# Altium PCB Axis Driver PCB.PcbDoc (part 2 of 2)
Units mil, origin at the board's own origin, x right, y up, seen from the top; angles counter-clockwise.
Board outline 7230 x 2255 mil, 2 copper layers (Top Layer, Bottom Layer); 120 components, 90 nets, 456 pads, 132 vias.
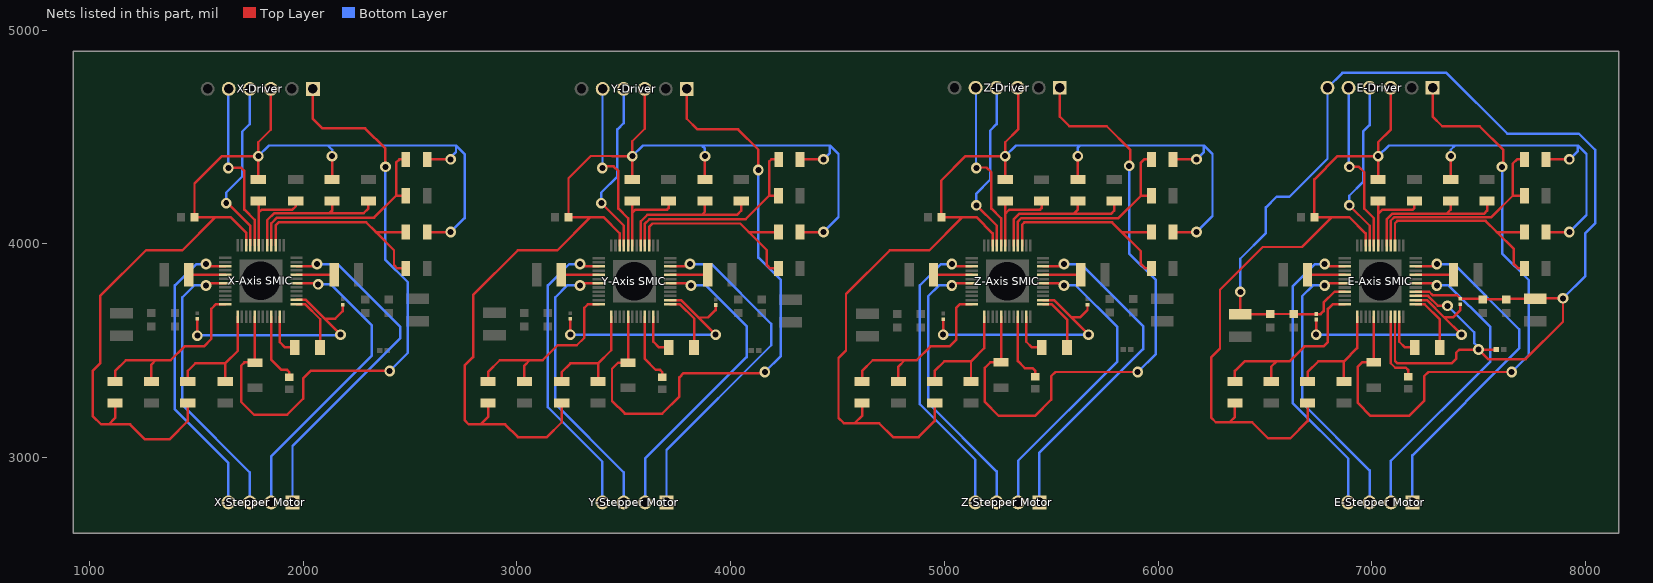
[diagram p2: the nets of this part, all layers, seen from the top]

## Via types
v1: diameter 50, hole 28, Top Layer to Bottom Layer, 128 vias
v2: diameter 200, hole 125, Top Layer to Bottom Layer, 4 vias

## Nets (pads, with @x,y where several pads share a name; then routed paths per layer and width w, separated by ;. In a path a pad name is that pad's centre, name@x,y a point inside that pad or via, vN(x,y) a via of type N, cw(c..) or ccw(c..) an arc to the next point about the centre after c; other vN are vias at no path point) (continued)
Net0.47uF_E_1: 0.47uF_E.1 100nF_2_E.1 100nF_3_E.1 100nF_4_E.1 100nF_5_E.1 100nF_16V_1_E.1 100nF_16V_2_E.1 100uF_1_E.1 100uF_2_E.1 "E-Axis SMIC.21" "E-Axis SMIC.34" "E-Axis SMIC.39" "E-Axis SMIC.40" E-Driver.6 | length 6470
  Top Layer w11.5: v1(6385,3775) 100uF_2_E.1@6385,3670 6523.5,3670 100nF_5_E.1@6525,3671.5 100nF_4_E.1@6635,3671.5 6635.51,3670.98 100nF_16V_2_E.1@6740,3670.98 6760.98,3670.98 6775,3685 6775,3725 6825.79,3775.79 6873.15,3775.79 ; 7108.9,3658.15 7108.9,3451.1 7120,3440 7373.26,3440 7395,3461.74 7395,3490 7410,3505 v1(7500,3505) ; 7206.85,3756.1 7263.9,3756.1 7310,3710 v1(7355,3710) ; 7206.85,3775.79 7269.21,3775.79 7285,3760 7397.99,3760 7411.69,3746.3 7412.48,3746.3 7415,3743.78 100nF_16V_1_E.1@7415,3742.99 7517.01,3742.99 100nF_2_E.1@7520,3740 100nF_3_E.1@7630,3740 7632.36,3742.36 100uF_1_E.1@7765,3742.36 7767.64,3745 v1(7895,3745) 7895,3635 7720,3460 7545,3460 v1(7500,3505) ; 0.47uF_E.1@7582.68,3505 v1(7500,3505)
  Bottom Layer w11.5: v1(6385,3775) 6385,3930 6505,4050 6505,4170 6555,4220 6615,4220 6793.15,4398.15 E-Driver.6@6793.15,4730 6863.15,4800 7350,4800 7635,4515 7970,4515 8045,4440 8045,4095 8000,4050 8000,3850 v1(7895,3745) ; v1(7355,3710) 7480,3585 7480,3535.42 7500,3515.42 v1(7500,3505)
Net0.47uF_E_2: 
Net4.7uF_E_2: 4.7uF_E.2 "E-Axis SMIC.33" | length 342.9
  Top Layer w11.5: 7089.21,3658.15 7089.21,3440.79 7110,3420 7160,3420 7170,3410 4.7uF_E.2@7170,3377.95
Net4.7uF_X_2: 4.7uF_X.2 "X-Axis SMIC.33" | length 334.9
  Top Layer w11.5: 1851.06,3659.25 1851.06,3456.89 1897.95,3410 1925,3410 1935,3400 4.7uF_X.2@1935,3375
Net4.7uF_Y_2: 4.7uF_Y.2 "Y-Axis SMIC.33" | length 328.3
  Top Layer w11.5: 3599.21,3658.15 3599.21,3460.79 3650,3410 3670,3410 3680,3400 4.7uF_Y.2@3680,3375
Net4.7uF_Z_2: 4.7uF_Z.2 "Z-Axis SMIC.33" | length 335.4
  Top Layer w11.5: 5344.21,3658.15 5344.21,3450.79 5376.5,3418.5 5413.58,3418.5 5425,3407.08 4.7uF_Z.2@5425,3377.95
Net10k_Dr_Enb_E_2: 10k_Dr_Enb_E.2 "E-Axis SMIC.29" E-Driver.1 | length 3019.5
  Top Layer w11.5: 7010.47,3658.15 7010.47,3445.47 10k_Dr_Enb_E.2@7010,3445 6955,3445 6935,3425 6935,3255 6995,3195 7175,3195 7245,3265 7245,3380 7265,3400 v1(7655,3400) ; E-Driver.1@7285.28,4730 7285.28,4594.72 7330,4550 7505,4550 7614.54,4440.46 7614.54,4364.54 v1(7610,4360)
  Bottom Layer w11.5: v1(7610,4360) 7610,3955 7735,3830 7735,3480 v1(7655,3400)
Net10k_Dr_Enb_X_2: 10k_Dr_Enb_X.2 "X-Axis SMIC.29" X-Driver.1 | length 2968.8
  Top Layer w11.5: 1772.32,3659.25 1772.32,3446.73 1770.59,3445 1725,3445 1710,3430 1710,3260 1770,3200 1925,3200 2000,3275 2000,3370 2035,3405 v1(2405,3405) ; X-Driver.1@2045.28,4725 2045.28,4584.72 2090,4540 2290,4540 2385,4445 v1(2385,4360)
  Bottom Layer w11.5: v1(2385,4360) 2385,3925 2490,3820 2490,3490 v1(2405,3405)
Net10k_Dr_Enb_Y_2: 10k_Dr_Enb_Y.2 "Y-Axis SMIC.29" Y-Driver.1 | length 2974.3
  Top Layer w11.5: 3520.47,3658.15 3520.47,3444.53 10k_Dr_Enb_Y.2@3520,3444.06 3474.06,3444.06 3445,3415 3445,3265 3505,3205 3680,3205 3760,3285 3760,3375 3780,3395 4155,3395 v1(4160,3400) ; Y-Driver.1@3795,4725 3795,4585 3845,4535 4035,4535 4130,4440 v1(4130,4345)
  Bottom Layer w11.5: v1(4130,4345) 4130,3935 4235,3830 4235,3475 v1(4160,3400)
Net10k_Dr_Enb_Z_2: 10k_Dr_Enb_Z.2 "Z-Axis SMIC.29" Z-Driver.1 | length 3007.5
  Top Layer w11.5: 5265.47,3658.15 5265.47,3445.47 10k_Dr_Enb_Z.2@5265,3445 5215,3445 5190,3420 5190,3260 5255,3195 5425,3195 5500,3270 5500,3380 5520,3400 v1(5905,3400) ; Z-Driver.1@5540.28,4730 5540.28,4594.72 5585,4550 5760,4550 5869.25,4440.75 5869.25,4369.25 v1(5865,4365)
  Bottom Layer w11.5: v1(5865,4365) 5865,3955 5990,3830 5990,3485 v1(5905,3400)
Net22nF_E_1: 22nF_E.1 "E-Axis SMIC.37" | length 272.7
  Top Layer w11.5: 7207.01,3716.58 7206.85,3716.73 7248.27,3716.73 7319.06,3645.94 22nF_E.1@7319.06,3515
Net22nF_E_2: 22nF_E.2 "E-Axis SMIC.35" | length 200
  Top Layer w11.5: 7128.58,3658.15 7128.58,3541.42 7155,3515 22nF_E.2@7200.94,3515
Net22nF_X_1: 22nF_X.1 "X-Axis SMIC.37" | length 272.8
  Top Layer w11.5: 1968.7,3717.83 2008.83,3717.83 2080,3646.67 2080,3515.94 22nF_X.1@2079.06,3515
Net22nF_X_2: 22nF_X.2 "X-Axis SMIC.35" | length 200.4
  Top Layer w11.5: 1890.43,3659.25 1890.43,3539.57 1915,3515 22nF_X.2@1960.94,3515
Net22nF_Y_1: 22nF_Y.1 "Y-Axis SMIC.37" | length 276.2
  Top Layer w11.5: 3716.85,3716.73 3763.27,3716.73 3830,3650 3830,3515.94 22nF_Y.1@3829.06,3515
Net22nF_Y_2: 22nF_Y.2 "Y-Axis SMIC.35" | length 200
  Top Layer w11.5: 3638.58,3658.15 3638.58,3541.42 3665,3515 22nF_Y.2@3710.94,3515
Net22nF_Z_1: 22nF_Z.1 "Z-Axis SMIC.37" | length 273.3
  Top Layer w11.5: 5461.85,3716.73 5503.27,3716.73 5575,3645 5575,3515.94 22nF_Z.1@5574.06,3515
Net22nF_Z_2: 22nF_Z.2 "Z-Axis SMIC.35" | length 200
  Top Layer w11.5: 5383.58,3658.15 5383.58,3541.42 5410,3515 22nF_Z.2@5455.94,3515
Net100nF_1_E_2: 100nF_1_E.2 "E-Axis SMIC.10" CFG0_VCC_IO_E.1 CFG1_VCC_IO_E.1 CFG2_VCC_IO_E.1 CFG3_VCC_IO_E.1 CFG4_VCC_IO_E.1 CFG5_VCC_IO_E.1 E-Driver.3 | length 5171
  Top Layer w11.5: CFG4_VCC_IO_E.1@6360,3254.8 6360,3190 6335,3165 ; CFG5_VCC_IO_E.1@6700,3254.8 6700,3170 6620,3090 6515,3090 6440,3165 6335,3165 ; 6971.1,3991.85 6971.1,4048.9 6895,4125 6813.25,4125 ; CFG0_VCC_IO_E.1@7030,4300.39 v1(7030,4410) ; E-Driver.3@7088.43,4730 7090,4728.43 7090,4535 7030,4475 v1(7030,4410) ; CFG1_VCC_IO_E.1@7370,4300.2 v1(7370,4410) ; CFG3_VCC_IO_E.1@7815.2,4055 v1(7925,4055) ; CFG2_VCC_IO_E.1@7815.2,4395 v1(7925,4395) ; 6335,3165 6270,3165 6250,3185 6250,3470 6290,3510 6290,3785 6490,3985 6673.25,3985 6813.25,4125 ; 6813.25,4125 100nF_1_E.2@6731.5,4125 6731.5,4301.5 6840,4410 v1(7030,4410)
  Bottom Layer w11.5: v1(7030,4410) 7080,4460 7390,4460 ; v1(7370,4410) 7370,4440 7390,4460 ; v1(7925,4055) 8005,4135 8005,4420 7965,4460 ; v1(7925,4395) 7965,4435 7965,4460 ; 7390,4460 7965,4460
Net100nF_1_X_2: 100nF_1_X.2 "X-Axis SMIC.10" CFG0_VCC_IO_X.1 CFG1_VCC_IO_X.1 CFG2_VCC_IO_X.1 CFG3_VCC_IO_X.1 CFG4_VCC_IO_X.1 CFG5_VCC_IO_X.1 X-Driver.3 | length 5135.6
  Top Layer w11.5: CFG4_VCC_IO_X.1@1120,3254.61 1120,3185 1090,3155 ; CFG5_VCC_IO_X.1@1460,3254.8 1460,3170 1375,3085 1260,3085 1190,3155 1090,3155 ; 1732.95,3992.95 1732.95,4052.05 1660,4125 1590,4125 ; CFG0_VCC_IO_X.1@1790,4300.2 v1(1790,4410) ; X-Driver.3@1848.43,4725 1848.43,4533.43 1790,4475 v1(1790,4410) ; CFG1_VCC_IO_X.1@2135,4300.2 v1(2135,4410) ; CFG3_VCC_IO_X.1@2580.2,4055 v1(2690,4055) ; CFG2_VCC_IO_X.1@2580.2,4395 v1(2690,4395) ; 1090,3155 1055,3155 1015,3195 1015,3405 1050,3440 1050,3755 1265,3970 1435,3970 1590,4125 ; 1590,4125 100nF_1_X.2@1491.5,4125 1491.5,4281.5 1620,4410 v1(1790,4410)
  Bottom Layer w11.5: v1(1790,4410) 1840,4460 2115,4460 ; v1(2135,4410) 2135,4440 2115,4460 ; v1(2690,4055) 2755,4120 2755,4420 2715,4460 ; v1(2690,4395) 2690,4404.75 2715,4429.75 2715,4460 ; 2115,4460 2715,4460
Net100nF_1_Y_2: 100nF_1_Y.2 "Y-Axis SMIC.10" CFG0_VCC_IO_Y.1 CFG1_VCC_IO_Y.1 CFG2_VCC_IO_Y.1 CFG3_VCC_IO_Y.1 CFG4_VCC_IO_Y.1 CFG5_VCC_IO_Y.1 Y-Driver.3 | length 5181.8
  Top Layer w11.5: CFG4_VCC_IO_Y.1@2865,3255 2865,3190 2830,3155 ; CFG5_VCC_IO_Y.1@3210,3254.8 3210,3165 3140,3095 3005,3095 2945,3155 2830,3155 ; 3481.1,3991.85 3481.1,4048.9 3405,4125 3345,4125 ; CFG0_VCC_IO_Y.1@3540,4300.2 v1(3540,4410) ; Y-Driver.3@3598.15,4725 3598.15,4538.15 3540,4480 v1(3540,4410) ; CFG1_VCC_IO_Y.1@3880,4300.2 v1(3880,4410) ; CFG3_VCC_IO_Y.1@4325.2,4055 v1(4435,4055) ; CFG2_VCC_IO_Y.1@4325.39,4395 v1(4435,4395) ; 2830,3155 2775,3155 2755,3175 2755,3430 2795,3470 2795,3760 3005,3970 3190,3970 3345,4125 ; 3345,4125 100nF_1_Y.2@3241.5,4125 3241.5,4306.5 3345.75,4410.75 3444.25,4410.75 3445,4410 v1(3540,4410)
  Bottom Layer w11.5: v1(3540,4410) 3590,4460 3870,4460 ; v1(3880,4410) 3880,4445 3870,4455 3870,4460 ; v1(4435,4055) 4505,4125 4505,4420 4465,4460 ; v1(4435,4395) 4465,4425 4465,4460 ; 3870,4460 4465,4460
Net100nF_1_Z_2: 100nF_1_Z.2 "Z-Axis SMIC.10" CFG0_VCC_IO_Z.1 CFG1_VCC_IO_Z.1 CFG2_VCC_IO_Z.1 CFG3_VCC_IO_Z.1 CFG4_VCC_IO_Z.1 CFG5_VCC_IO_Z.1 Z-Driver.3 | length 5167.1
  Top Layer w11.5: CFG4_VCC_IO_Z.1@4615,3254.8 4615,3195 4580,3160 ; CFG5_VCC_IO_Z.1@4955,3254.8 4955,3170 4880,3095 4760,3095 4695,3160 4580,3160 ; 5226.1,3991.85 5226.1,4048.9 5150,4125 5080,4125 ; CFG0_VCC_IO_Z.1@5285,4300.2 v1(5285,4410) ; Z-Driver.3@5343.43,4730 5345,4728.43 5345,4535 5285,4475 v1(5285,4410) ; CFG1_VCC_IO_Z.1@5625,4300.2 v1(5625,4410) ; CFG3_VCC_IO_Z.1@6070.2,4055 v1(6180,4055) ; CFG2_VCC_IO_Z.1@6070.2,4395 v1(6180,4395) ; 4580,3160 4530,3160 4505,3185 4505,3465 4540,3500 4540,3765 4745,3970 4930,3970 5080,4120 5080,4125 ; 5080,4125 100nF_1_Z.2@4986.5,4125 4985,4126.5 4985,4295 5100,4410 v1(5285,4410)
  Bottom Layer w11.5: v1(5285,4410) 5335,4460 5635,4460 ; v1(5625,4410) 5625,4450 5635,4460 ; v1(6180,4055) 6255,4130 6255,4420 6215,4460 ; v1(6180,4395) 6215,4430 6215,4460 ; 5635,4460 6215,4460
Net100nF_16V_1_E_2: 100nF_16V_1_E.2 100nF_16V_2_E.2 "E-Axis SMIC.38" | length 1146.9
  Top Layer w11.5: v1(6740,3575) 100nF_16V_2_E.2@6740,3645 ; 7206.85,3736.42 7258.58,3736.42 7339.29,3655.71 ; 100nF_16V_1_E.2@7415,3717.01 7415,3690 7380.71,3655.71 7339.29,3655.71 ; v1(7420,3575) 7339.29,3655.71
  Bottom Layer w11.5: v1(6740,3575) v1(7420,3575)
Net100nF_16V_1_X_2: 100nF_16V_1_X.2 100nF_16V_2_X.2 "X-Axis SMIC.38" | length 1154.2
  Top Layer w11.5: v1(1505,3570) 100nF_16V_2_X.2@1505,3649.02 ; 1968.7,3737.52 2012.48,3737.52 2100,3650 ; v1(2175,3575) 2100,3650 ; 100nF_16V_1_X.2@2185,3715 2185,3685 2150,3650 2100,3650
  Bottom Layer w11.5: v1(1505,3570) 1507.5,3572.5 2172.5,3572.5 v1(2175,3575)
Net100nF_16V_1_Y_2: 100nF_16V_1_Y.2 100nF_16V_2_Y.2 "Y-Axis SMIC.38" | length 1152.5
  Top Layer w11.5: v1(3250,3575) 100nF_16V_2_Y.2@3250,3649.02 ; 3716.85,3736.42 3768.58,3736.42 3850,3655 ; v1(3930,3575) 3850,3655 ; 100nF_16V_1_Y.2@3930,3714.02 3930,3690 3895,3655 3850,3655
  Bottom Layer w11.5: v1(3250,3575) v1(3930,3575)
Net100nF_16V_1_Z_2: 100nF_16V_1_Z.2 100nF_16V_2_Z.2 "Z-Axis SMIC.38" | length 1146.9
  Top Layer w11.5: v1(4995,3575) 100nF_16V_2_Z.2@4995,3647.01 ; 5461.85,3736.42 5513.58,3736.42 5594.29,3655.71 ; 100nF_16V_1_Z.2@5670,3715 5670,3690 5635.71,3655.71 5594.29,3655.71 ; v1(5675,3575) 5594.29,3655.71
  Bottom Layer w11.5: v1(4995,3575) v1(5675,3575)
NetBRA_0.2_E_1: "E-Axis SMIC.44" BRA_0.2_E.1 | length 176.3
  Top Layer w11.5: 7206.85,3854.53 7382.44,3854.53 BRA_0.2_E.1@7382.91,3855
NetBRA_0.25_X_1: "X-Axis SMIC.44" BRA_0.25_X.1 | length 176.6
  Top Layer w11.5: 1968.7,3855.63 2144.37,3855.63 BRA_0.25_X.1@2145,3855
NetBRA_0.25_Y_1: "Y-Axis SMIC.44" BRA_0.25_Y.1 | length 176.3
  Top Layer w11.5: 3716.85,3854.53 3892.44,3854.53 BRA_0.25_Y.1@3892.91,3855
NetBRA_0.25_Z_1: "Z-Axis SMIC.44" BRA_0.25_Z.1 | length 176.3
  Top Layer w11.5: 5461.85,3854.53 5637.44,3854.53 BRA_0.25_Z.1@5637.91,3855
NetBRB_0.2_E_1: "E-Axis SMIC.17" BRB_0.2_E.1 | length 173.3
  Top Layer w11.5: BRB_0.2_E.1@6700,3855 6700.47,3854.53 6873.15,3854.53
NetBRB_0.25_X_1: "X-Axis SMIC.17" BRB_0.25_X.1 | length 171.1
  Top Layer w11.5: BRB_0.25_X.1@1464.17,3855 1464.8,3855.63 1635,3855.63
NetBRB_0.25_Y_1: "Y-Axis SMIC.17" BRB_0.25_Y.1 | length 176.3
  Top Layer w11.5: BRB_0.25_Y.1@3207.09,3855 3359.55,3855 3360.02,3854.53 3383.15,3854.53
NetBRB_0.25_Z_1: "Z-Axis SMIC.17" BRB_0.25_Z.1 | length 178.3
  Top Layer w11.5: BRB_0.25_Z.1@4950,3855 5104.55,3855 5105.02,3854.53 5128.15,3854.53
NetCFG0_GND_E_2: "E-Axis SMIC.7" CFG0_GND_E.2 CFG0_VCC_IO_E.2 | length 422.2
  Top Layer w11.5: CFG0_VCC_IO_E.2@7030,4200 7030.16,4199.84 7030.16,4140 ; 7030.16,3991.85 7030.16,4140 ; CFG0_GND_E.2@7200,4199.8 7200,4166.74 7193.26,4160 7050.16,4160 7030.16,4140
NetCFG0_GND_X_2: "X-Axis SMIC.7" CFG0_GND_X.2 CFG0_VCC_IO_X.2 | length 417.9
  Top Layer w11.5: CFG0_VCC_IO_X.2@1790,4199.8 1792.01,4197.8 1792.01,4145 ; 1792.01,3992.95 1792.01,4145 ; CFG0_GND_X.2@1965,4199.8 1965,4175 1950,4160 1807.01,4160 1792.01,4145
NetCFG0_GND_Y_2: "Y-Axis SMIC.7" CFG0_GND_Y.2 CFG0_VCC_IO_Y.2 | length 419.9
  Top Layer w11.5: CFG0_VCC_IO_Y.2@3540,4199.8 3540.16,4199.65 3540.16,4145 ; 3540.16,3991.85 3540.16,4145 ; CFG0_GND_Y.2@3710,4199.8 3710,4166.74 3703.26,4160 3555.16,4160 3540.16,4145
NetCFG0_GND_Z_2: "Z-Axis SMIC.7" CFG0_GND_Z.2 CFG0_VCC_IO_Z.2 | length 419.7
  Top Layer w11.5: CFG0_VCC_IO_Z.2@5285,4199.8 5285.16,4199.65 5285.16,4145 ; 5285.16,3991.85 5285.16,4145 ; CFG0_GND_Z.2@5455,4199.61 5455,4166.74 5448.26,4160 5305,4160 5290,4145 5285.16,4145
NetCFG1_GND_E_2: "E-Axis SMIC.5" CFG1_GND_E.2 CFG1_VCC_IO_E.2 | length 722.8
  Top Layer w11.5: 7069.53,3991.85 7069.53,4114.53 7095,4140 7350,4140 ; CFG1_VCC_IO_E.2@7370,4199.8 7370,4160 7350,4140 ; CFG1_GND_E.2@7540,4199.8 7540,4155 7525,4140 7350,4140
NetCFG1_GND_X_2: "X-Axis SMIC.5" CFG1_GND_X.2 CFG1_VCC_IO_X.2 | length 709.2
  Top Layer w11.5: 1831.38,3992.95 1831.38,4109.88 1865,4143.5 2123.5,4143.5 ; CFG1_VCC_IO_X.2@2135,4199.8 2135,4155 2123.5,4143.5 ; CFG1_GND_X.2@2305,4199.8 2305,4165 2283.5,4143.5 2123.5,4143.5
NetCFG1_GND_Y_2: "Y-Axis SMIC.5" CFG1_GND_Y.2 CFG1_VCC_IO_Y.2 | length 719.9
  Top Layer w11.5: 3579.53,3991.85 3579.53,4104.53 3610,4135 3865,4135 ; CFG1_VCC_IO_Y.2@3880,4199.8 3880,4150 3865,4135 ; CFG1_GND_Y.2@4050,4199.8 4050,4155 4030,4135 3865,4135
NetCFG1_GND_Z_2: "Z-Axis SMIC.5" CFG1_GND_Z.2 CFG1_VCC_IO_Z.2 | length 722.8
  Top Layer w11.5: 5324.53,3991.85 5324.53,4114.53 5350,4140 5605,4140 ; CFG1_VCC_IO_Z.2@5625,4199.8 5625,4160 5605,4140 ; CFG1_GND_Z.2@5795,4199.8 5795,4155 5780,4140 5605,4140
NetCFG2_GND_E_2: "E-Axis SMIC.4" CFG2_GND_E.2 CFG2_VCC_IO_E.2 | length 1003.1
  Top Layer w11.5: 7089.21,3991.85 7089.21,4107.71 7105,4123.5 7558.5,4123.5 7660,4225 ; CFG2_GND_E.2@7714.8,4225 7660,4225 ; CFG2_VCC_IO_E.2@7714.8,4395 7680,4395 7660,4375 7660,4225
NetCFG2_GND_X_2: "X-Axis SMIC.4" CFG2_GND_X.2 CFG2_VCC_IO_X.2 | length 991.3
  Top Layer w11.5: 1851.06,3992.95 1851.06,4096.06 1877.25,4122.25 2332.25,4122.25 2435,4225 ; CFG2_GND_X.2@2479.8,4225 2435,4225 ; CFG2_VCC_IO_X.2@2479.8,4395 2450,4395 2435,4380 2435,4225
NetCFG2_GND_Y_2: "Y-Axis SMIC.4" CFG2_GND_Y.2 CFG2_VCC_IO_Y.2 | length 991.3
  Top Layer w11.5: 3599.21,3991.85 3599.21,4094.21 3620,4115 4070,4115 4180,4225 ; CFG2_GND_Y.2@4224.8,4225 4180,4225 ; CFG2_VCC_IO_Y.2@4225,4395 4190,4395 4180,4385 4180,4225
NetCFG2_GND_Z_2: "Z-Axis SMIC.4" CFG2_GND_Z.2 CFG2_VCC_IO_Z.2 | length 999
  Top Layer w11.5: 5344.21,3991.85 5344.21,4104.21 5360,4120 5815,4120 5920,4225 ; CFG2_GND_Z.2@5969.8,4225 5920,4225 ; CFG2_VCC_IO_Z.2@5969.8,4395 5935,4395 5920,4380 5920,4225
NetCFG3_GND_E_2: "E-Axis SMIC.3" CFG3_GND_E.2 CFG3_VCC_IO_E.2 | length 977.3
  Top Layer w11.5: 7108.9,3991.85 7108.9,4095.9 7120,4107 7533,4107 7585,4055 ; CFG3_GND_E.2@7714.8,3885 7713.42,3886.38 7683.62,3886.38 7665,3905 7665,3975 7585,4055 ; CFG3_VCC_IO_E.2@7714.8,4055 7585,4055
NetCFG3_GND_X_2: "X-Axis SMIC.3" CFG3_GND_X.2 CFG3_VCC_IO_X.2 | length 977.6
  Top Layer w11.5: 1870.75,3992.95 1870.75,4085.75 1885,4100 2295,4100 2340,4055 ; CFG3_GND_X.2@2479.8,3885 2440,3885 2425,3900 2425,3970 2340,4055 ; CFG3_VCC_IO_X.2@2479.8,4055 2340,4055
NetCFG3_GND_Y_2: "Y-Axis SMIC.3" CFG3_GND_Y.2 CFG3_VCC_IO_Y.2 | length 967.4
  Top Layer w11.5: 3618.9,3991.85 3618.9,4078.9 3635,4095 4045,4095 4085,4055 ; CFG3_GND_Y.2@4224.8,3885 4185,3885 4170,3900 4170,3970 4085,4055 ; CFG3_VCC_IO_Y.2@4224.8,4055 4085,4055
NetCFG3_GND_Z_2: "Z-Axis SMIC.3" CFG3_GND_Z.2 CFG3_VCC_IO_Z.2 | length 971.6
  Top Layer w11.5: 5363.9,3991.85 5363.9,4088.9 5375,4100 5785,4100 5830,4055 ; CFG3_GND_Z.2@5969.8,3885 5968.46,3886.34 5938.66,3886.34 5920,3905 5920,3965 5830,4055 ; CFG3_VCC_IO_Z.2@5969.8,4055 5830,4055
NetCFG4_GND_2: "Z-Axis SMIC.24" CFG4_GND.2 CFG4_VCC_IO_Z.2 | length 892.2
  Top Layer w11.5: CFG4_VCC_IO_Z.2@4615,3355.2 4615,3405 4665,3455 4815,3455 ; CFG4_GND.2@4785,3355.2 4785,3425 4815,3455 ; 5128.15,3716.73 5071.73,3716.73 5055,3700 5055,3550 5025,3520 4935,3520 4870,3455 4815,3455
NetCFG4_GND_E_2: "E-Axis SMIC.24" CFG4_GND_E.2 CFG4_VCC_IO_E.2 | length 888
  Top Layer w11.5: CFG4_VCC_IO_E.2@6360,3355.2 6360,3405 6405,3450 6555,3450 ; CFG4_GND_E.2@6530,3355.2 6530,3425 6555,3450 ; 6873.15,3716.73 6816.73,3716.73 6795,3695 6795,3540 6775,3520 6685,3520 6615,3450 6555,3450
NetCFG4_GND_X_2: "X-Axis SMIC.24" CFG4_GND_X.2 CFG4_VCC_IO_X.2 | length 884.7
  Top Layer w11.5: CFG4_VCC_IO_X.2@1120,3355 1120,3405 1170,3455 1310,3455 ; CFG4_GND_X.2@1290,3355.2 1290,3435 1310,3455 ; 1635,3717.83 1592.83,3717.83 1570,3695 1570,3555 1535,3520 1445,3520 1380,3455 1310,3455
NetCFG4_GND_Y_2: "Y-Axis SMIC.24" CFG4_GND_Y.2 CFG4_VCC_IO_Y.2 | length 886.1
  Top Layer w11.5: CFG4_VCC_IO_Y.2@2865,3355.39 2865,3400 2920,3455 3060,3455 ; CFG4_GND_Y.2@3035,3355.2 3035,3430 3060,3455 ; 3383.15,3716.73 3331.73,3716.73 3315,3700 3315,3560 3280,3525 3190,3525 3120,3455 3060,3455
NetCFG5_GND_E_1: "E-Axis SMIC.25" CFG5_GND_E.2 CFG5_VCC_IO_E.2 | length 564
  Top Layer w11.5: CFG5_VCC_IO_E.2@6700,3355.2 6700,3400 6750,3450 6870,3450 ; CFG5_GND_E.2@6870,3355.2 6870,3450 ; 6931.73,3658.15 6931.73,3511.73 6870,3450
NetCFG5_GND_X_2: "X-Axis SMIC.25" CFG5_GND_X.2 CFG5_VCC_IO_X.2 | length 567.6
  Top Layer w11.5: CFG5_VCC_IO_X.2@1460,3355.2 1460,3405 1495,3440 1635,3440 ; CFG5_GND_X.2@1635,3355.2 1635,3440 ; 1693.58,3659.25 1693.58,3498.58 1635,3440
NetCFG5_GND_Y_1: "Y-Axis SMIC.25" CFG5_GND_Y.2 CFG5_VCC_IO_Y.2 | length 559.9
  Top Layer w11.5: CFG5_VCC_IO_Y.2@3210,3355.2 3210,3400 3250,3440 3380,3440 ; CFG5_GND_Y.2@3380,3355.2 3380,3440 ; 3441.73,3658.15 3441.73,3501.73 3380,3440
NetCFG5_GND_Z_1: "Z-Axis SMIC.25" CFG5_GND_Z.2 CFG5_VCC_IO_Z.2 | length 567
  Top Layer w11.5: CFG5_VCC_IO_Z.2@4955,3355.2 4955,3405 5000,3450 5125,3450 ; CFG5_GND_Z.2@5125,3355.2 5125,3450 ; 5186.73,3658.15 5186.73,3511.73 5125,3450
"NetE-Axis SMIC_8": "E-Axis SMIC.8" E-Driver.5 | length 813.8
  Top Layer w11.5: v1(6895,4360) 6940,4360 6965,4335 6965,4165 7010.47,4119.53 7010.47,3991.85
  Bottom Layer w11.5: E-Driver.5@6891.57,4730 6893.29,4728.29 6893.29,4361.71 v1(6895,4360)
"NetE-Axis SMIC_9": "E-Axis SMIC.9" E-Driver.4 | length 817.2
  Top Layer w11.5: v1(6895,4180) 6990.79,4084.21 6990.79,3991.85
  Bottom Layer w11.5: v1(6895,4180) 6895,4225 6960,4290 6960,4525 6990,4555 E-Driver.4@6990,4730
"NetE-Axis SMIC_15": "E-Axis SMIC.15" "E-Stepper Motor.4" | length 1408.9
  Top Layer w11.5: v1(6780,3905) 6790.42,3905 6801.52,3893.9 6873.15,3893.9
  Bottom Layer w11.5: v1(6780,3905) 6735,3905 6630,3800 6630,3255 6890,2995 6890,2790
"NetE-Axis SMIC_19": "E-Axis SMIC.19" "E-Stepper Motor.3" | length 1318.5
  Top Layer w11.5: v1(6780,3805) 6790.42,3805 6800.58,3815.16 6873.15,3815.16
  Bottom Layer w11.5: v1(6780,3805) 6725,3805 6675,3755 6675,3255 6990,2940 6990,2790
"NetE-Axis SMIC_42": "E-Axis SMIC.42" "E-Stepper Motor.2" | length 1445.7
  Top Layer w11.5: 7206.85,3815.16 7284.42,3815.16 7294.58,3805 v1(7305,3805)
  Bottom Layer w11.5: 7090,2790 7090,2985 7555,3450 7555,3610 7360,3805 v1(7305,3805)
"NetE-Axis SMIC_46": "E-Axis SMIC.46" "E-Stepper Motor.1" | length 1631.2
  Top Layer w11.5: 7206.85,3893.9 7283.48,3893.9 7294.58,3905 v1(7305,3905)
  Bottom Layer w11.5: 7190,2790 7190,3010 7690,3510 7690,3600 7385,3905 v1(7305,3905)
"NetX-Axis SMIC_8": "X-Axis SMIC.8" X-Driver.5 | length 818.5
  Top Layer w11.5: v1(1650,4355) 1710,4355 1725,4340 1725,4160 1772.32,4112.68 1772.32,3992.95
  Bottom Layer w11.5: v1(1650,4355) 1650,4723.43 X-Driver.5@1651.57,4725
"NetX-Axis SMIC_9": "X-Axis SMIC.9" X-Driver.4 | length 827.2
  Top Layer w11.5: v1(1640,4190) 1645,4190 1752.64,4082.36 1752.64,3992.95
  Bottom Layer w11.5: v1(1640,4190) 1640,4240 1715,4315 1715,4525 1750,4560 X-Driver.4@1750,4725
"NetX-Axis SMIC_15": "X-Axis SMIC.15" "X-Stepper Motor.4" | length 1399.1
  Top Layer w11.5: v1(1545,3905) 1555.42,3905 1565.42,3895 1635,3895
  Bottom Layer w11.5: v1(1545,3905) 1500,3905 1400,3805 1400,3225 1650,2975 1650,2790
"NetX-Axis SMIC_19": "X-Axis SMIC.19" "X-Stepper Motor.3" | length 1319.7
  Top Layer w11.5: v1(1545,3805) 1555.42,3805 1566.68,3816.26 1635,3816.26
  Bottom Layer w11.5: v1(1545,3805) 1490,3805 1435,3750 1435,3245 1750,2930 1750,2790 ; 1760,2791.26 1761.26,2790
"NetX-Axis SMIC_42": "X-Axis SMIC.42" "X-Stepper Motor.2" | length 1457.3
  Top Layer w11.5: 1968.7,3816.26 1968.86,3816.1 2063.9,3816.1 v1(2070,3810)
  Bottom Layer w11.5: 1850,2790 1850,3005 2320,3475 2320,3620 2130,3810 v1(2070,3810)
"NetX-Axis SMIC_46": "X-Axis SMIC.46" "X-Stepper Motor.1" | length 1641.8
  Top Layer w11.5: 1968.7,3895 2044.58,3895 2054.58,3905 v1(2065,3905)
  Bottom Layer w11.5: 1950,2790 1950,3054.21 2455,3559.21 2455,3610 2160,3905 v1(2065,3905)
"NetY-Axis SMIC_8": "Y-Axis SMIC.8" Y-Driver.5 | length 824.8
  Top Layer w11.5: v1(3400,4355) 3407.37,4362.37 3452.63,4362.37 3475,4340 3475,4165 3520.47,4119.53 3520.47,3991.85
  Bottom Layer w11.5: v1(3400,4355) 3400.65,4355.65 3400.65,4724.35 Y-Driver.5@3401.3,4725
"NetY-Axis SMIC_9": "Y-Axis SMIC.9" Y-Driver.4 | length 820.6
  Top Layer w11.5: v1(3395,4190) 3500.79,4084.21 3500.79,3991.85
  Bottom Layer w11.5: v1(3395,4190) 3395,4240 3470,4315 3470,4535 3500,4565 3500,4724.72 Y-Driver.4@3499.72,4725
"NetY-Axis SMIC_15": "Y-Axis SMIC.15" "Y-Stepper Motor.4" | length 1404.8
  Top Layer w11.5: v1(3295,3905) 3305.42,3905 3316.52,3893.9 3383.15,3893.9
  Bottom Layer w11.5: v1(3295,3905) 3245,3905 3145,3805 3145,3235 3400,2980 3400,2790
"NetY-Axis SMIC_19": "Y-Axis SMIC.19" "Y-Stepper Motor.3" | length 1322.7
  Top Layer w11.5: v1(3295,3805) 3305.42,3805 3315.58,3815.16 3383.15,3815.16
  Bottom Layer w11.5: v1(3295,3805) 3235,3805 3180,3750 3180,3250 3500,2930 3500,2790
"NetY-Axis SMIC_42": "Y-Axis SMIC.42" "Y-Stepper Motor.2" | length 1462.8
  Top Layer w11.5: 3716.85,3815.16 3794.42,3815.16 3804.58,3805 v1(3815,3805)
  Bottom Layer w11.5: 3600,2790 3600,2995 4075,3470 4075,3615 3885,3805 v1(3815,3805)
"NetY-Axis SMIC_46": "Y-Axis SMIC.46" "Y-Stepper Motor.1" | length 1631.7
  Top Layer w11.5: 3716.85,3893.9 3788.48,3893.9 3799.58,3905 v1(3810,3905)
  Bottom Layer w11.5: 3700,2790 3700,3035 4190,3525 4190,3625 3910,3905 v1(3810,3905)
NetY-Driver_2: 
"NetZ-Axis SMIC_8": "Z-Axis SMIC.8" Z-Driver.5 | length 818.3
  Top Layer w11.5: v1(5150,4355) 5152,4357 5198,4357 5220,4335 5220,4165 5265.47,4119.53 5265.47,3991.85
  Bottom Layer w11.5: Z-Driver.5@5146.57,4730 5148.29,4728.29 5148.29,4356.71 v1(5150,4355)
"NetZ-Axis SMIC_9": "Z-Axis SMIC.9" Z-Driver.4 | length 817.2
  Top Layer w11.5: v1(5150,4180) 5245.79,4084.21 5245.79,3991.85
  Bottom Layer w11.5: v1(5150,4180) 5150,4235 5215,4300 5215,4530 5245,4560 Z-Driver.4@5245,4730
"NetZ-Axis SMIC_15": "Z-Axis SMIC.15" "Z-Stepper Motor.4" | length 1411.9
  Top Layer w11.5: v1(5035,3905) 5045.42,3905 5056.52,3893.9 5128.15,3893.9
  Bottom Layer w11.5: v1(5035,3905) 4985,3905 4885,3805 4885,3250 5145,2990 5145,2790
"NetZ-Axis SMIC_19": "Z-Axis SMIC.19" "Z-Stepper Motor.3" | length 1327.4
  Top Layer w11.5: v1(5035,3805) 5045.42,3805 5055.58,3815.16 5128.15,3815.16
  Bottom Layer w11.5: v1(5035,3805) 4975,3805 4925,3755 4925,3255 5245,2935 5245,2790 ; 5255,2791.26 5256.26,2790
"NetZ-Axis SMIC_42": "Z-Axis SMIC.42" "Z-Stepper Motor.2" | length 1445.7
  Top Layer w11.5: 5461.85,3815.16 5534.42,3815.16 5537.22,3812.37 5552.63,3812.37 v1(5560,3805)
  Bottom Layer w11.5: 5345,2790 5345,2985 5810,3450 5810,3610 5615,3805 v1(5560,3805)
"NetZ-Axis SMIC_46": "Z-Axis SMIC.46" "Z-Stepper Motor.1" | length 1618.8
  Top Layer w11.5: 5461.85,3893.9 5538.48,3893.9 5549.58,3905 v1(5560,3905)
  Bottom Layer w11.5: 5445,2790 5445,3022.5 5930,3507.5 5930,3615 5640,3905 v1(5560,3905)
pads on no net: "E-Axis SMIC.6" "E-Axis SMIC.11" "E-Axis SMIC.14" "E-Axis SMIC.16" "E-Axis SMIC.18" "E-Axis SMIC.20" "E-Axis SMIC.22" "E-Axis SMIC.23" "E-Axis SMIC.26" "E-Axis SMIC.27" "E-Axis SMIC.28" "E-Axis SMIC.30" "E-Axis SMIC.31" "E-Axis SMIC.36" "E-Axis SMIC.41" "E-Axis SMIC.43" "E-Axis SMIC.45" "E-Axis SMIC.47" "X-Axis SMIC.6" "X-Axis SMIC.11" "X-Axis SMIC.14" "X-Axis SMIC.16" "X-Axis SMIC.18" "X-Axis SMIC.20" "X-Axis SMIC.22" "X-Axis SMIC.23" "X-Axis SMIC.26" "X-Axis SMIC.27" "X-Axis SMIC.28" "X-Axis SMIC.30" "X-Axis SMIC.31" "X-Axis SMIC.36" "X-Axis SMIC.41" "X-Axis SMIC.43" "X-Axis SMIC.45" "X-Axis SMIC.47" "Y-Axis SMIC.6" "Y-Axis SMIC.11" "Y-Axis SMIC.14" "Y-Axis SMIC.16" "Y-Axis SMIC.18" "Y-Axis SMIC.20" "Y-Axis SMIC.22" "Y-Axis SMIC.23" "Y-Axis SMIC.26" "Y-Axis SMIC.27" "Y-Axis SMIC.28" "Y-Axis SMIC.30" "Y-Axis SMIC.31" "Y-Axis SMIC.36" "Y-Axis SMIC.41" "Y-Axis SMIC.43" "Y-Axis SMIC.45" "Y-Axis SMIC.47" "Z-Axis SMIC.6" "Z-Axis SMIC.11" "Z-Axis SMIC.14" "Z-Axis SMIC.16" "Z-Axis SMIC.18" "Z-Axis SMIC.20" "Z-Axis SMIC.22" "Z-Axis SMIC.23" "Z-Axis SMIC.26" "Z-Axis SMIC.27" "Z-Axis SMIC.28" "Z-Axis SMIC.30" "Z-Axis SMIC.31" "Z-Axis SMIC.36" "Z-Axis SMIC.41" "Z-Axis SMIC.43" "Z-Axis SMIC.45" "Z-Axis SMIC.47"
copper on no net:
  other v2: 1050,2770 8030,2770 1050,4775 8030,4775

## Polygon pours and split planes (outlines as drawn)
GND on Bottom Layer "GND_L02_P000" (solid, pour order 0): 1000,2720 8080,2720 8080,4825 1000,4825